# EAGLE board MBUS reader through hole V.0.1 (EAGLE 8.2.2)
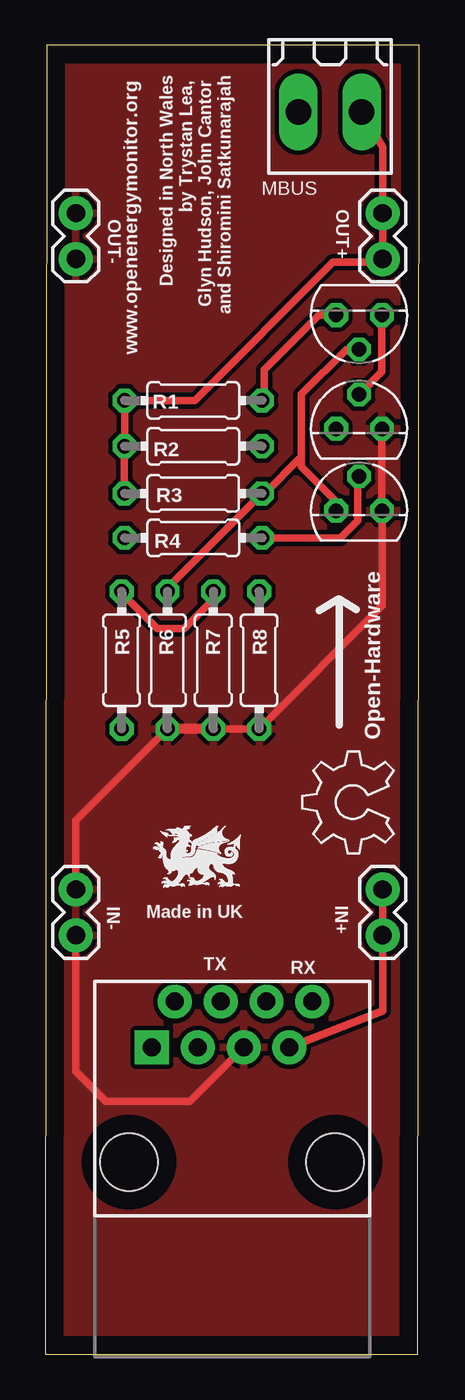
[diagram p0: board, top side]
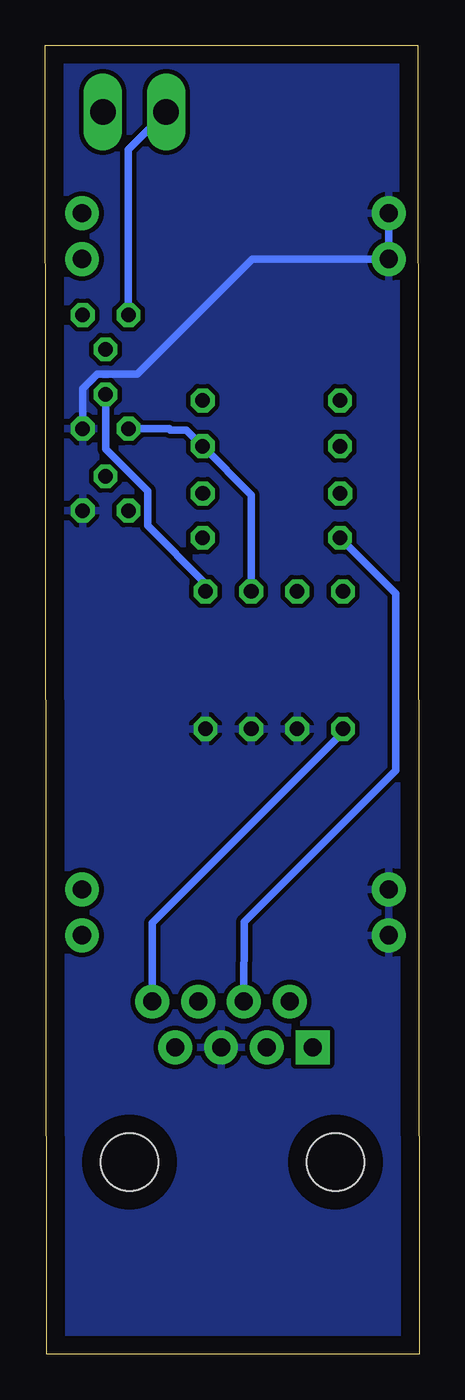
[diagram p1: board, bottom side, seen from below]

Size 20.75 x 72.6 mm. Coordinates in mm from the lower left corner, seen from the top.
Outline: 20.65,0 20.75,72.6 0.1,72.6 0,0 20.65,0
Copper layers (1*16): Top 0.035mm / dielectric 1.5mm / Bottom 0.035mm
Design rules "default *": minimum track width 10mil, minimum drill 24mil, track to track 8mil, track to pad 8mil, pad to pad 8mil, via to via 8mil, smd to smd 8mil, copper to edge 40mil, drill to drill 8mil, minimum pad ring 10mil, minimum via ring 8mil, stop-mask expansion 0.075mm, vias tented up to drill 0.6mm, thermal gap 10mil
Net classes: 0 default: width 0.203 mm, drill 0.6 mm, clearance 0.203 mm; 1 power: width 0.381 mm, drill 0.6 mm, clearance 0.254 mm; 2 gnd: width 0.254 mm, drill 0.6 mm, clearance 0.254 mm

## Footprints (pad centres in the part's own frame; a part is rotated, then mirrored left to right if it is on the bottom)
1X02 = drill 1.016 pad 1.88: 1 0,0; 2 2.54,0
180-2 = drill 1.422 long: 1 -1.75,0; 2 1.75,0
TO92 = drill 0.813 octagon: 1 1.27,0; 2 0,1.905; 3 -1.27,0
0204/7 = drill 0.813 octagon: 1 -3.81,0; 2 3.81,0
RJ45-8 = drill 1 pad 1.88 square: 1 -4.445,6.35 | drill 1 pad 1.88: 2 -3.175,8.89; 3 -1.905,6.35; 4 -0.635,8.89; 5 0.635,6.35; 6 1.905,8.89; 7 3.175,6.35; 8 4.445,8.89 | hole 3.2: -5.715,0; 5.715,0

## Placement (x,y rotation side)
JP4  [1X02]  1.71,60.74 90 top
JP5  [1X02]  18.71,60.74 90 top
JP6  [1X02]  1.71,23.24 90 top
JP7  [1X02]  18.71,23.24 90 top
LOGO1  OSHW_LOGO_6MILX0200-NT  [OSHW_6X200_NOTEXT]  19.33,27.78 90 top
MBUS  [180-2]  15.79,68.89 180 top
Q1  BC337  [TO92]  17.4,46.78 0 top
Q2  BC337  [TO92]  17.4,51.33 0 top
R1  220k  [0204/7]  8.21,52.9 180 top
R2  33k  [0204/7]  8.21,50.36 180 top
R3  39k  [0204/7]  8.21,47.74 180 top
R4  1k  [0204/7]  8.21,45.28 180 top
R5  1k  [0204/7]  4.24,38.5 270 top
R6  22k  [0204/7]  6.78,38.5 90 top
R7  3k3  [0204/7]  9.32,38.5 90 top
R8  82r  [0204/7]  11.86,38.5 90 top
T1  BC307  [TO92]  17.4,57.63 180 top
U$13  RJ45-8PTH  [RJ45-8]  10.37,10.67 0 top

## Library data of the parts
JP4-JP7 = SparkFun
LOGO1 = ohw-logo
MBUS = con-weidmueller-sl35; OC_FARNELL: unknown; OC_NEWARK: unknown
Q1 Q2 = transistor
R1-R8 = resistor
T1 = transistor-pnp
U$13 = SparkFun-Connectors

## Nets
5V [power]: JP7.1 JP7.2 U$13.7
24V: JP5.1 JP5.2 MBUS.1 R1.2 R2.2 R3.2
A6: R5.2 U$13.8
D5: R4.2 U$13.4
GND [power]: JP4.1 JP4.2 JP6.1 JP6.2 Q1.1 Q2.1 R6.1 R7.1 R8.1 U$13.5
N$1: MBUS.2 R1.1 T1.1
N$16: Q2.2 R8.2 T1.3
N$18: Q1.3 R3.1 R6.2 T1.2
N$21: Q2.3 R2.1 R5.1 R7.2
N$25: Q1.2 R4.1

## Tracks (layer width: path | path; a pad name or v marks a point on that pad's centre or on a via)
5V
  Top 0.406: JP7.2 JP7.1 18.71,19.04 U$13.7
24V
  Top 0.406: R3.2 R2.2 R1.2 8.29,52.9 15.95,60.56 18.53,60.56 JP5.1 JP5.2 18.71,66.94 MBUS.1
A6
  Bottom 0.406: R5.2 4.24,34.47 14.8,23.91 U$13.8
D5
  Top 0.406: R4.2 4.44,45.24 4.71,45.24
  Bottom 0.406: R4.2 1.32,42.2 1.32,32.37 9.71,23.98 U$13.4
GND
  Top 0.406: JP4.1 1.68,60.71 | R6.1 1.71,29.61 JP6.2 | Q2.1 Q1.1 18.7,46.76 18.7,41.52 R8.1 R7.1 | U$13.5 8.02,14.04 3.36,14.04 1.71,15.69 JP6.1
  Top 0.559: R7.1 R6.1
  Bottom 0.406: JP4.2 JP4.1 9.26,60.74 15.65,54.35 17.87,54.35 18.67,53.54 Q2.1
  pour Bottom (isolate 0.254): -0.05,60.41 -0.15,40.01 0,25.08 0.1,-0.86 21.44,-0.86 21.44,73.36 -0.05,73.36
  pour Top (isolate 0.254): -0.05,58.58 -0.13,47.3 0.03,23.22 -0.05,-0.86 21.44,-0.86 21.59,73.21 -0.1,73.26
N$1
  Top 0.406: T1.1 15.16,57.63 12.14,54.62 12.14,53.02 R1.1
  Bottom 0.406: 16.14,57.64 T1.1 16.13,66.81 MBUS.2
N$16
  Top 0.406: T1.3 18.67,54.5 Q2.2
  Bottom 0.406: R8.2 11.86,42.75 15.07,45.96 15.07,47.86 17.4,50.2 Q2.2
N$18
  Top 0.406: 14.21,49.79 14.21,49.24 16.21,47.24 Q1.3 | 14.21,49.79 14.21,53.24 16.69,55.73 T1.2 | R6.2 6.78,42.51 R3.1 12.16,47.74 14.21,49.79
N$21
  Top 0.406: R7.2 9.21,42.19 9.21,41.74 7.71,40.24 6.23,40.24 4.24,42.23 R5.1 4.21,42.27
  Bottom 0.406: R7.2 9.32,47.66 R2.1 12.93,51.26 13.82,51.26 13.88,51.33 Q2.3
N$25
  Top 0.406: Q1.2 17.32,48.61 17.32,46.23 16.37,45.28 R4.1

## Text on the board
tPlace: OUT+ | OUT- | Open-Hardware | IN- | IN+ | Made in UK | TX | RX
_tsilk: Designed in North Wales / by Trystan Lea, / Glyn Hudson, John Cantor / and Shiromini Satkunarajah | www.openenergymonitor.org